# Altium PCB PCB_HACK_FLY_ALTIUM_2026-04-11.pcbdoc
Units mm, origin at the board's own origin, x right, y up, seen from the top; angles counter-clockwise.
Board outline 80.92 x 78.38 mm, 2 copper layers (Top Layer, Bottom Layer); 29 components, 36 nets, 118 pads, 13 vias.
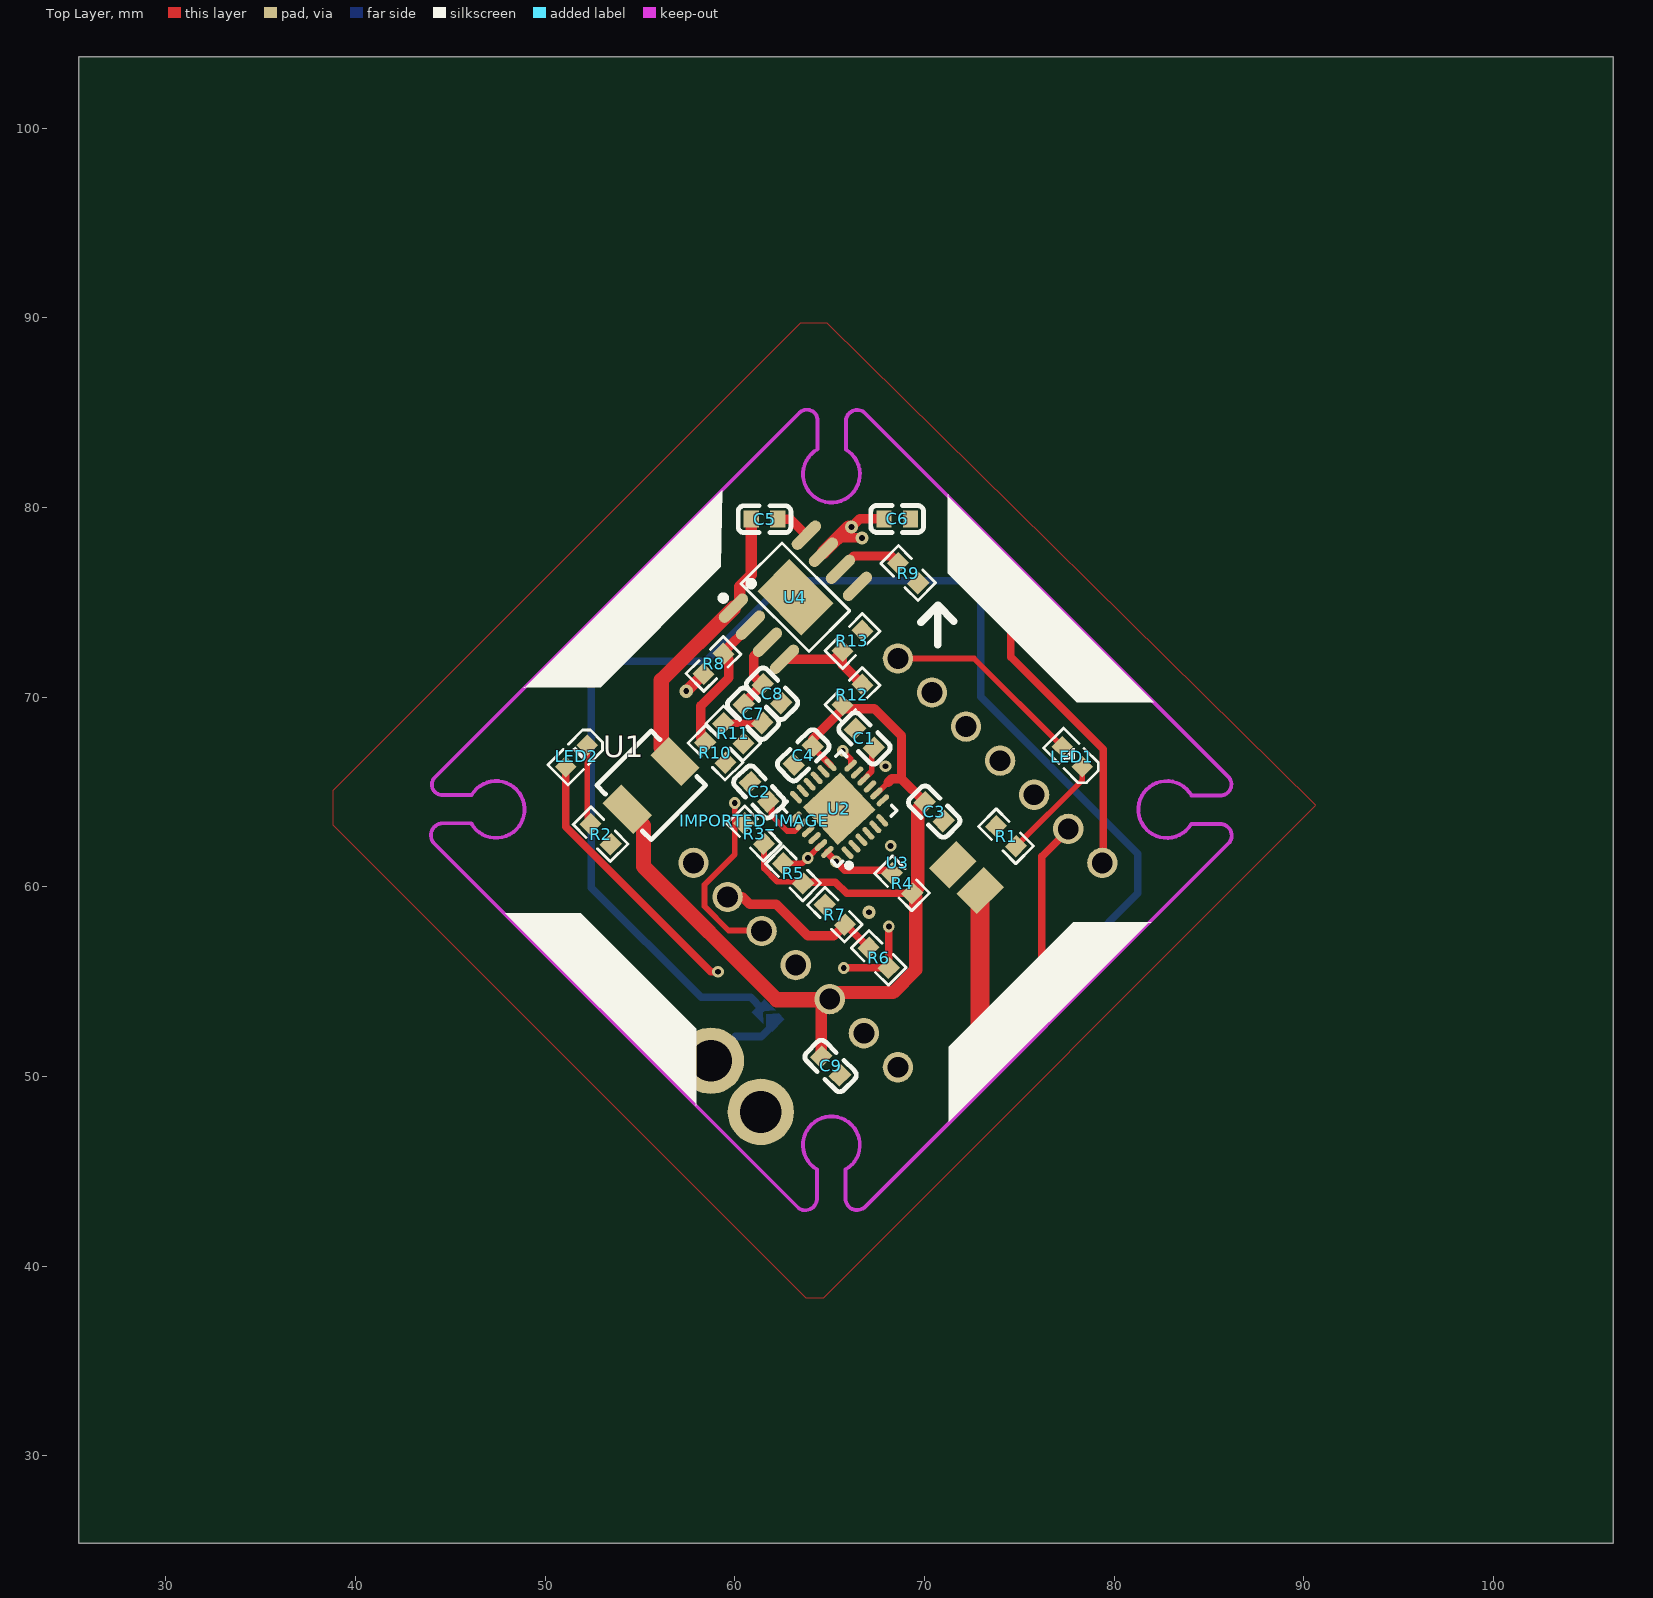
[diagram p0: Top Layer view]
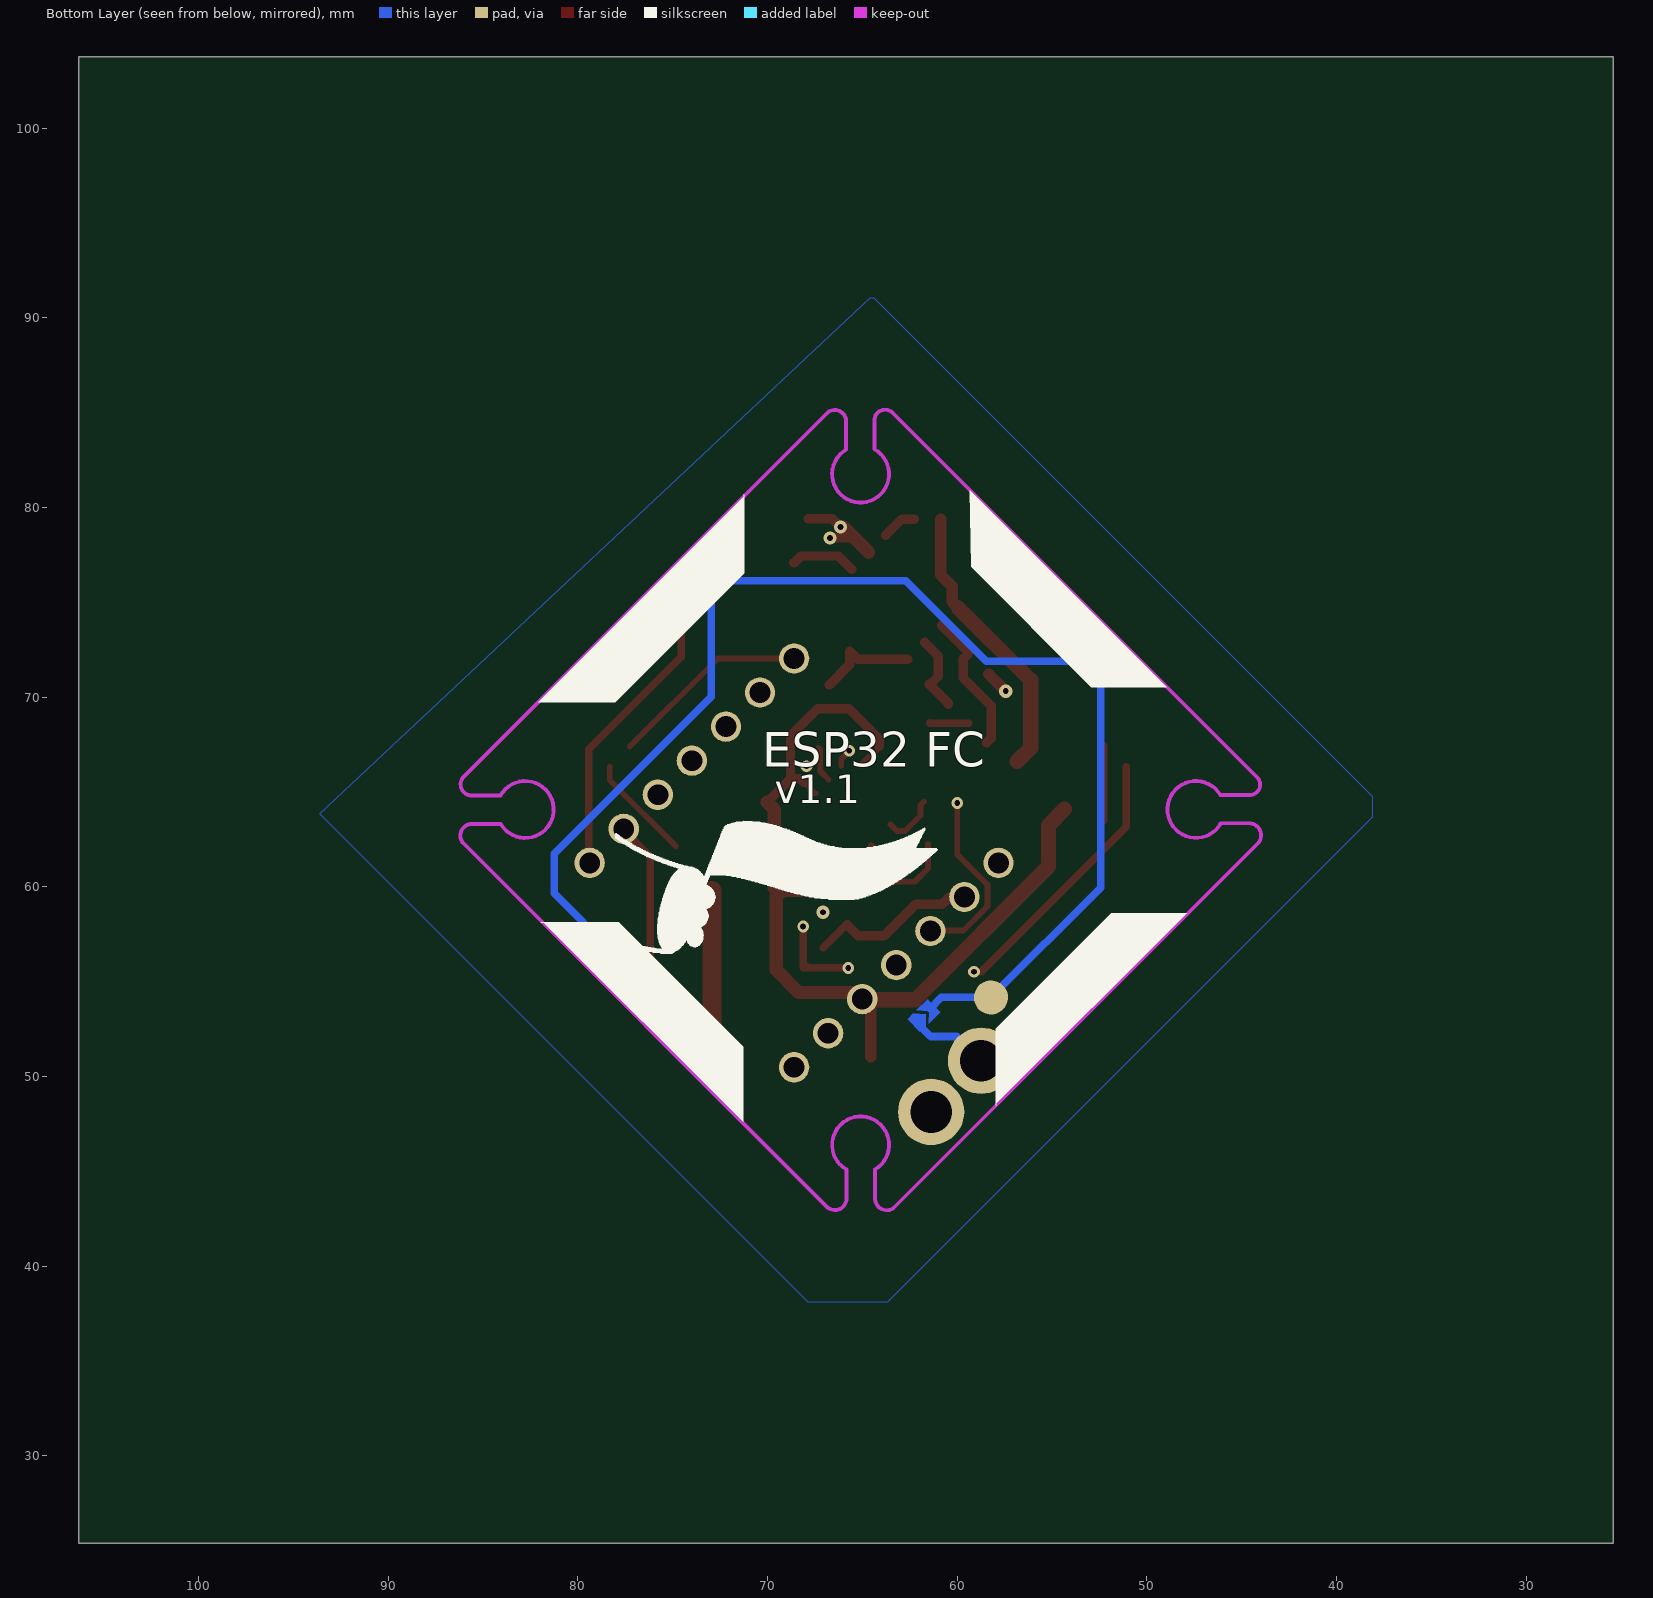
[diagram p1: Bottom Layer view, seen from below]

## Layer stack, top to bottom
Top Layer: signal copper (thickness not stored)
Dielectric: dielectric 0.32, FR-4, Dk 4.8
Bottom Layer: signal copper (thickness not stored)

## Board outline
106.317,25.4 25.4,25.4 25.4,103.777 106.317,103.777

## Components (designator, comment, footprint, x,y, rotation, side; value= is the part's Value field where it differs from the comment)
C1 "100nF" C0603 66.829,67.835 r315 top
C2 "100nF" C0603 61.272,65.009 r313 top
C3 "100nF" C0603 70.509,63.972 r315 top
C4 "100nF" C0603 63.603,66.94 r44 top
C5 "100nF" C0603 61.563,79.39 r0 top
C6 "10uF" C0603 68.556,79.402 r180 top
C7 "220pf" C0603 60.958,69.138 r315 top
C8 "ns" C0603 61.959,70.187 r315 top
C9 "220pf" C0603 65.045,50.56 r315 top
IMPORTED_IMAGE "IMPORTED_IMAGE" IMPORTED_IMAGE 61.022,63.481 r0 top
LED1 "LED-0603" LED0603-RD 77.79,66.871 r135 top
LED2 "0603,0M6MM_HEIGHTCHIPLED,GREEN" LED0603-RD_GREEN 51.65,66.899 r225 top
R1 "200Ω" R0603 74.295,62.674 r315 top
R2 "200Ω" R0603 52.921,62.78 r135 top
R3 "10kΩ" R0603 61.009,62.814 r314 top
R4 "10kΩ" R0603 68.817,60.193 r315 top
R5 "10kΩ" R0603 63.07,60.713 r315 top
R6 "10kΩ" R0603 67.584,56.264 r135 top
R7 "10kΩ" R0603 65.267,58.539 r135 top
R8 "100kΩ" R0603 58.873,71.76 r225 top
R9 "200kΩ" R0603 69.137,76.548 r315 top
R10 "24.9kΩ" R0603 58.974,67.079 r315 top
R11 "68.1kΩ" R0603 59.917,68.097 r315 top
R12 "124kΩ" R0603 66.199,70.123 r45 top
R13 "40.2kΩ" R0603 66.201,72.97 r225 top
U1 "IND-SMD_L4.5-W4.1_SL0420" IND-SMD_L4.5-W4.1_SL0420 55.588,65.357 r45 top
U2 "MPU6050-YJLTY" QFN-24_L4.0-W4.0-P0.50-BL-EP2.7 65.491,64.117 r43 top
U3 "CONN-SMD_XIAO_ESP32S#" CONN-SMD_XIAO_ESP32S# 68.937,60.927 r225 top
U4 "MP1584EN-LF" SOIC-8_L4.9-W3.9-P1.27-LS6.0-BL-EP3.3-1 63.192,75.274 r315 top

## Footprints (in the part's own frame and the unit in brackets; to place one, negate y for a bottom-side part, rotate by r counter-clockwise, add the part's x,y. Pads: shape width x height; smd on the part's side, far side on the other; paste and mask are expansions set on the pad)
C0603 [mm]
  rect 0.8x0.9 smd paste+0 mask+0.051: 1(-0.7,0) 2(0.7,0)
  silkscreen extent -1.39,-0.71 1.39,0.71
CONN-SMD_XIAO_ESP32S# [mm]
  round 1.6 hole 1.1 paste+0 mask+0.051: 1(-7.62,7.137) 2(-7.62,4.597) 3(-7.62,2.057) 4(-7.62,-0.483) 5(-7.62,-3.023) 6(-7.62,-5.563) 7(-7.62,-8.103) 8(7.62,-8.103) 9(7.62,-5.563) 10(7.62,-3.023) 11(7.62,-0.483) 12(7.62,2.057) 13(7.62,4.597) 14(7.62,7.137)
IMPORTED_IMAGE [mm]
IND-SMD_L4.5-W4.1_SL0420 [mm]
  rect 1.4x2.3 smd paste+0 mask+0.05: 1(-1.775,0) 2(1.775,0)
  silkscreen extent -2.03,-2.03 2.03,2.03
LED0603-RD [mm]
  rect 0.8x0.8 smd paste+0 mask+0.051: 1(-0.749,0) 2(0.749,0)
  silkscreen extent -1.49,-0.75 1.39,0.76
LED0603-RD_GREEN [mm]
  rect 0.8x0.8 smd paste+0 mask+0.051: 1(-0.799,-0.003) 2(0.799,0.004)
  silkscreen extent -1.49,-0.75 1.39,0.76
QFN-24_L4.0-W4.0-P0.50-BL-EP2.7 [mm]
  oval 0.28x0.8 smd paste-100 mask+0.05: 1(-1.25,-2) 2(-0.75,-2) 3(-0.25,-2) 4(0.25,-2) 5(0.75,-2) 6(1.25,-2) 13(1.25,2) 14(0.75,2) 15(0.25,2) 16(-0.25,2) 17(-0.75,2) 18(-1.242,2)
  oval 0.8x0.28 smd paste-100 mask+0.05: 7(2,-1.25) 8(2,-0.75) 9(2,-0.25) 10(2,0.25) 11(2,0.75) 12(2,1.25) 19(-2,1.25) 20(-2,0.75) 21(-2,0.25) 22(-2,-0.25) 23(-2,-0.75) 24(-2,-1.25)
  rect 2.7x2.7 smd paste-100 mask+0.05: 25(0.012,0)
  silkscreen extent -2.14,-2.79 2.16,2.15
R0603 [mm]
  rect 0.806x0.864 smd paste-100 mask+0.051: 1(-0.753,0) 2(0.753,0)
  silkscreen extent -1.39,-0.66 1.39,0.66
SOIC-8_L4.9-W3.9-P1.27-LS6.0-BL-EP3.3-1 [mm]
  oval 0.602x1.941 smd paste+0 mask+0.05: 1(-1.905,-2.72) 2(-0.635,-2.72) 3(0.635,-2.72) 4(1.905,-2.72) 5(1.905,2.72) 6(0.635,2.72) 7(-0.635,2.72) 8(-1.905,2.72)
  rect 3.3x2.4 smd paste+0 mask+0.05: 9(0,0)
  silkscreen extent -2.81,-2.87 2.53,1.52

## Free pads (board coordinates)
  round 3.5 hole 2.2 paste+0 mask+0.051: 1(58.736,50.836) 1(61.368,48.137)
  round 1.8 hole 0.991 paste+0 mask+0.051: 10(52.434,71.891) 10(72.964,76.651) 10(78.171,56.585) 11(53.963,73.447) 11(55.325,53.263) 11(74.555,75.095) 11(76.58,55.049)
  round 2.2 hole 1.5 paste+0 mask+0.051: 12(53.601,54.959) 12(55.657,75.141) 12(74.933,53.387) 12(76.222,73.39)
  rect 2.2x2.2 hole 1.5 rot 45 paste+0 mask+0.051: 13(51.823,56.832) 13(57.545,76.982) 13(73.039,51.506) 13(78.084,71.566)
  rect 2.032x1.524 smd rot 45 paste+0 mask+0.051: 15(72.934,59.812) 16(71.48,61.174)
  round 1.8 smd far side paste-100 mask+0.05: 21(58.216,54.174)

## Via types
v1: diameter 0.62, hole 0.31, Top Layer to Bottom Layer, tented both sides, 8 vias
v2: diameter 0.7, hole 0.31, Top Layer to Bottom Layer, tented both sides, 4 vias
v3: diameter 0.61, hole 0.31, Top Layer to Bottom Layer, tented both sides, 1 vias

## Nets (pads, with @x,y where several pads share a name; then routed paths per layer and width w, separated by ;. In a path a pad name is that pad's centre, name@x,y a point inside that pad or via, vN(x,y) a via of type N, cw(c..) or ccw(c..) an arc to the next point about the centre after c; other vN are vias at no path point)
3.3V: C3.1 C4.2 C9.1 R3.2 R4.2 R5.2 R12.1 U1.1 U2.8 U2.13 U3.12 | length 57
  Top Layer w0.3: R3.2 61.532,60.968 62.229,60.271 63.512,60.271 R5.2 ; U2.8 67.498,64.933 68.262,65.697
  Top Layer w0.35: C4.2 64.106,67.367 U2.13
  Top Layer w0.4: R5.2 63.674,60.252 65.297,60.252 65.888,59.66 R4.2
  Top Layer w0.5: C4.2 64.106,67.795 65.717,69.405 67.35,69.405 68.785,67.97 68.785,65.696 C3.1 ; 68.074,65.509 68.262,65.697 68.784,65.697
  Top Layer w0.6: C9.1 64.55,53.63 U3.12
  Top Layer w0.7: U3.12@65.06,54.088 65.402,54.43 68.338,54.43 69.536,55.628 69.536,59.474 R4.2 69.635,59.946 69.635,64.088 C3.1
  Top Layer w0.8: U1.1 55.188,63.245 55.188,61.071 62.207,54.053 64.973,54.053 U3.12
C5_1: C5.1 U1.2 U4.1 | length 15
  Top Layer w0.6: U4.1@59.921,74.698 60.258,75.034 60.258,75.844 60.863,76.451 C5.1
  Top Layer w0.8: U1.2 56.121,67.335 56.121,70.897 U4.1
C5_2: C5.2 U4.8 | length 1.9
  Top Layer w0.5: C5.2 62.924,79.39 U4.8
C7_2: C7.2 R11.1 | length 2.1
  Top Layer w0.4: R11.1 C7.2
GND: C1.1 C2.1 C3.2 C4.1 C6.1 C8.2 C9.2 pad.1@58.736,50.836 pad.12 pad.16 R1.1 R2.1 R7.2 R9.2 R10.2 R11.2 R13.1 U2.1 U2.9 U2.11 U2.18 U3.13 U4.5 U4.9 | length 4.3
  Bottom Layer w0.4: pad.1@58.737,50.835 60.012,52.113 61.378,52.113 62.189,52.913
  other v1: 67.948,66.361
  other v2: 67.076,58.666
  other v3: 68.214,62.166
INT: R3.1 U2.12 U3.10 | length 17.5
  Top Layer w0.3: v1(59.995,64.426) 59.994,61.709 58.397,60.111 58.397,58.983 59.672,57.708 61.439,57.708 U3.10@61.467,57.68 ; v1(65.684,67.18) 66.101,66.763 U2.12
  Mid-Layer 1 w0.4: v1(59.995,64.426) 60.025,64.426 62.755,67.156 65.66,67.156 v1(65.684,67.18)
LED: pad.10 pad.21 | length 70.8
  Bottom Layer w0.4: 61.423,53.58 60.829,54.174 pad.21 52.434,59.956 52.434,71.891 58.471,71.891 62.719,76.139 72.452,76.139 72.964,76.651 72.964,70.033 81.251,61.746 81.251,59.665 pad.10@78.171,56.585
LED1_1: LED1.1 R1.2 | length 5.6
  Top Layer w0.3: R1.2 78.32,65.633 LED1.1
LED1_2: LED1.2 U3.7 | length 10.5
  Top Layer w0.3: U3.7@68.652,72.049 72.612,72.049 LED1.2
LED2_2: LED2.2 U3.11 | length 18.8
  Top Layer w0.3: U3.11@63.089,55.709 U3.11@63.264,55.884
  Top Layer w0.4: LED2.2 51.086,63.179 58.737,55.531 v1@59.11,55.531
  Mid-Layer 1 w0.4: v1(59.109,55.531) 62.858,55.531 U3.11
M1: pad.11@74.555,75.095 U3.1 | length 15.8
  Top Layer w0.4: pad.11@74.555,75.095 74.555,72.124 79.428,67.251 U3.1@79.428,61.272
M2: pad.11@76.58,55.049 U3.2 | length 8.8
  Top Layer w0.4: pad.11@76.58,55.049 76.19,55.439 76.19,61.604 77.632,63.046 U3.2@77.632,63.068
M3: pad.11@55.325,53.263 U3.3 | length 25.3
  Mid-Layer 1 w0.4: pad.11@55.325,53.263 55.325,53.294 62.693,60.662 71.633,60.662 U3.3@75.836,64.864
M4: pad.11@53.963,73.447 U3.8 | length 13.8
  Mid-Layer 1 w0.5: pad.11@53.963,73.447 56.244,71.166 56.244,62.986 57.819,61.41 U3.8
R2_2: LED2.1 R2.2 | length 4.2
  Top Layer w0.3: LED2.1 52.213,63.488 R2.2
S$2537: 
S$2598: 
S$2698: 
S$2714: 
S$2718: 
S$2722: 
S$27431: 
S$27435: 
SCL: R5.1 U2.23 U3.6 | length 13.9
  Top Layer w0.3: R5.1 63.563,61.246 v1(63.845,61.528) 64.522,62.205 U2.23
  Mid-Layer 1 w0.3: v1(63.845,61.528) 63.845,63.649 U3.6@70.449,70.253
SDA: R4.1 U2.24 U3.5 | length 14
  Top Layer w0.35: U2.24@64.881,61.839 64.881,61.796 v1(65.332,61.345)
  Top Layer w0.4: v1(65.332,61.345) 65.801,60.876 68.284,60.876 R4.1
  Mid-Layer 1 w0.4: v1(65.332,61.345) 72.244,68.257 U3.5@72.244,68.456
U2_10: C1.2 U2.10 | length 1.9
  Top Layer w0.3: U2.10 67.215,66.096 67.215,67.231 C1.2@67.324,67.34
U2_20: C2.2 U2.20 | length 2.9
  Top Layer w0.3: C2.2 61.932,64.315 61.932,63.769 62.755,62.946 63.162,62.946 U2.20@63.517,63.301
U2_25: U2.25
U3_4: U3.4
U3_14: U3.14
U4_2: R8.1 R10.1 U4.2 | length 7.6
  Top Layer w0.5: R10.1 58.205,67.848 58.205,69.551 59.674,71.02 59.674,72.024 R8.1 59.405,72.385 U4.2
U4_3: C7.1 C8.1 U4.3 | length 4.2
  Top Layer w0.5: C7.1@60.463,69.633 60.463,69.681 61.464,70.682 61.415,70.682 60.991,71.106 60.991,72.175 U4.3
U4_4: R12.2 R13.2 U4.4 | length 5.5
  Top Layer w0.5: U4.4 65.234,72.003 R13.2 65.668,71.719 R12.2
U4_6: R9.1 U4.6 | length 3.5
  Top Layer w0.5: U4.6 66.265,77.449 68.236,77.449 R9.1
VBAT: C6.2 pad.1@61.368,48.137 pad.13 pad.15 R6.1 R8.2 U4.7 | length 20.6
  Top Layer w0.4: v1(65.738,55.731) R6.1 ; R6.1@67.995,55.853 R6.1 ; v1(68.117,57.917) R6.1@68.117,55.732
  Top Layer w0.5: U4.7 65.42,78.4 v2(66.704,78.4) ; v2(66.151,78.978) 66.575,79.402 C6.2
  Top Layer w0.6: v2(57.436,70.322) R8.2@58.341,71.229
  Top Layer w0.7: U4.7 65.998,78.978 v2(66.151,78.978)
  Top Layer w1: pad.15 72.934,51.611 pad.13@73.039,51.506
VSENSE: R6.2 R7.1 U3.9 | length 9
  Top Layer w0.4: R7.1 65.842,58.006 R6.2
  Top Layer w0.5: U3.9 60.4,59.472 60.774,59.098 62.172,59.098 63.848,57.422 65.215,57.422 R7.1
pads on no net: U2.2 U2.3 U2.4 U2.5 U2.6 U2.7 U2.14 U2.15 U2.16 U2.17 U2.19 U2.21 U2.22
copper on no net: | length 0

## Polygon pours and split planes (outlines as drawn)
VBAT on Bottom Layer (solid): 64.589,91.077 64.407,91.077 38.1,64.77 38.1,63.681 63.681,38.1 67.855,38.1 93.617,63.862
VBAT on Mid-Layer 2 (solid): 65.014,88.403 64.168,88.403 40.649,64.884 40.649,62.815 64.262,39.202 64.262,39.767 89.003,64.508
GND on Mid-Layer 1 (solid): 64.92,86.816 64.168,86.816 42.154,64.802 42.154,62.545 64.544,40.155 64.544,41.095 87.969,64.52 87.969,64.708 65.391,87.286
GND on Top Layer (solid): 64.861,89.712 63.451,89.712 38.803,65.064 38.803,63.276 63.732,38.347 64.673,38.347 90.638,64.312

## Keep-outs
Keep-Out Layer:
  lines w0.2 net S$2537: 46.1,63.351 ccw(c47.409,64.085) 46.118,64.849 ; 64.324,45.109 cw(c65.088,46.4) 65.832,45.097 ; 64.347,83.07 ccw(c65.091,81.767) 65.855,83.058 ; 84.061,63.319 cw(c82.77,64.082) 84.071,64.828
  lines w0.2 net S$2598: 44.132,62.306 cw(c44.601,62.725) 44.593,63.355 ; 63.408,85.006 cw(c63.797,84.602) 64.356,84.575 ; 65.833,43.595 ccw(c66.44,43.57) 66.832,43.106 ; 85.573,64.825 ccw(c85.6,65.405) 86.049,65.773
  lines w0.2 net S$2698: 44.163,65.761 ccw(c44.572,65.395) 44.617,64.848
  lines w0.2 net S$2714: 65.854,84.559 cw(c66.446,84.557) 66.833,85.005
  lines w0.2 net S$2718: 63.366,43.059 ccw(c63.71,43.571) 64.325,43.609
  lines w0.2 net S$2722: 85.562,63.319 cw(c85.584,62.71) 86.061,62.33

## Other copper
Bottom Layer:
  region net GND: 62.555,52.974 61.973,52.359 61.653,52.676 61.653,53.287 62.301,53.33 62.607,53.034 62.556,52.976
  region net LED: 61.483,52.793 60.885,53.387 60.878,53.404 61.504,54.012 61.55,54.068 62.156,53.493 61.483,53.452 61.48,53.449 61.49,52.81 61.486,52.807

## Silkscreen, mask and mechanical layers (free items; w line width, h text height)
Top Overlay:
  region: 59.266,76.886 52.915,70.535 48.935,70.535 59.323,80.923 59.266,76.91 59.266,76.886
  region: 48.935,70.535 48.909,70.509 48.877,70.509 48.903,70.535 48.935,70.535
  region: 71.286,51.573 71.286,51.576 77.84,58.13 81.923,58.13 81.941,58.112 81.785,58.112 71.281,47.608
  region: 51.808,58.607 51.869,58.607 57.954,52.522 57.954,48.484 57.928,48.458 57.928,48.585 47.895,58.618
  region: 78.02,69.742 71.213,76.549 71.213,80.681 71.247,80.715 71.247,80.579 82.084,69.742
  lines w0.4 net S$27431: 69.812,73.949 69.813,73.949 70.706,74.842 70.71,74.842 71.549,74.003
  lines w0.4 net S$27435: 70.706,72.784 70.706,74.842
Bottom Overlay:
  region: 78.02,69.742 71.213,76.549 71.213,80.681 71.247,80.715 71.247,80.579 82.084,69.742
  region: 59.266,76.886 52.915,70.535 48.935,70.535 59.323,80.923 59.266,76.91 59.266,76.886
  region: 71.286,51.573 71.286,51.576 77.84,58.13 81.923,58.13 81.941,58.112 81.785,58.112 71.281,47.608
  region: 51.808,58.607 51.869,58.607 57.954,52.522 57.954,48.484 57.928,48.458 57.928,48.585 47.895,58.618
  text "ESP32 FC" at 70.28,66.335 h1.8
  text "v1.1" at 69.612,64.412 h1.5
Bottom Solder:
  region net GND: 62.555,52.974 61.973,52.359 61.653,52.676 61.653,53.287 62.301,53.33 62.607,53.034 62.556,52.976
  region net LED: 61.483,52.793 60.885,53.387 60.878,53.404 61.504,54.012 61.55,54.068 62.156,53.493 61.483,53.452 61.48,53.449 61.49,52.81 61.486,52.807